# Altium PCB STM32.PcbDoc (part 2 of 2)
Units mil, origin at the board's own origin, x right, y up, seen from the top; angles counter-clockwise.
Board outline 5198.85 x 3910.46 mil, 2 copper layers (Top Layer, Bottom Layer); 118 components, 169 nets, 618 pads, 156 vias.
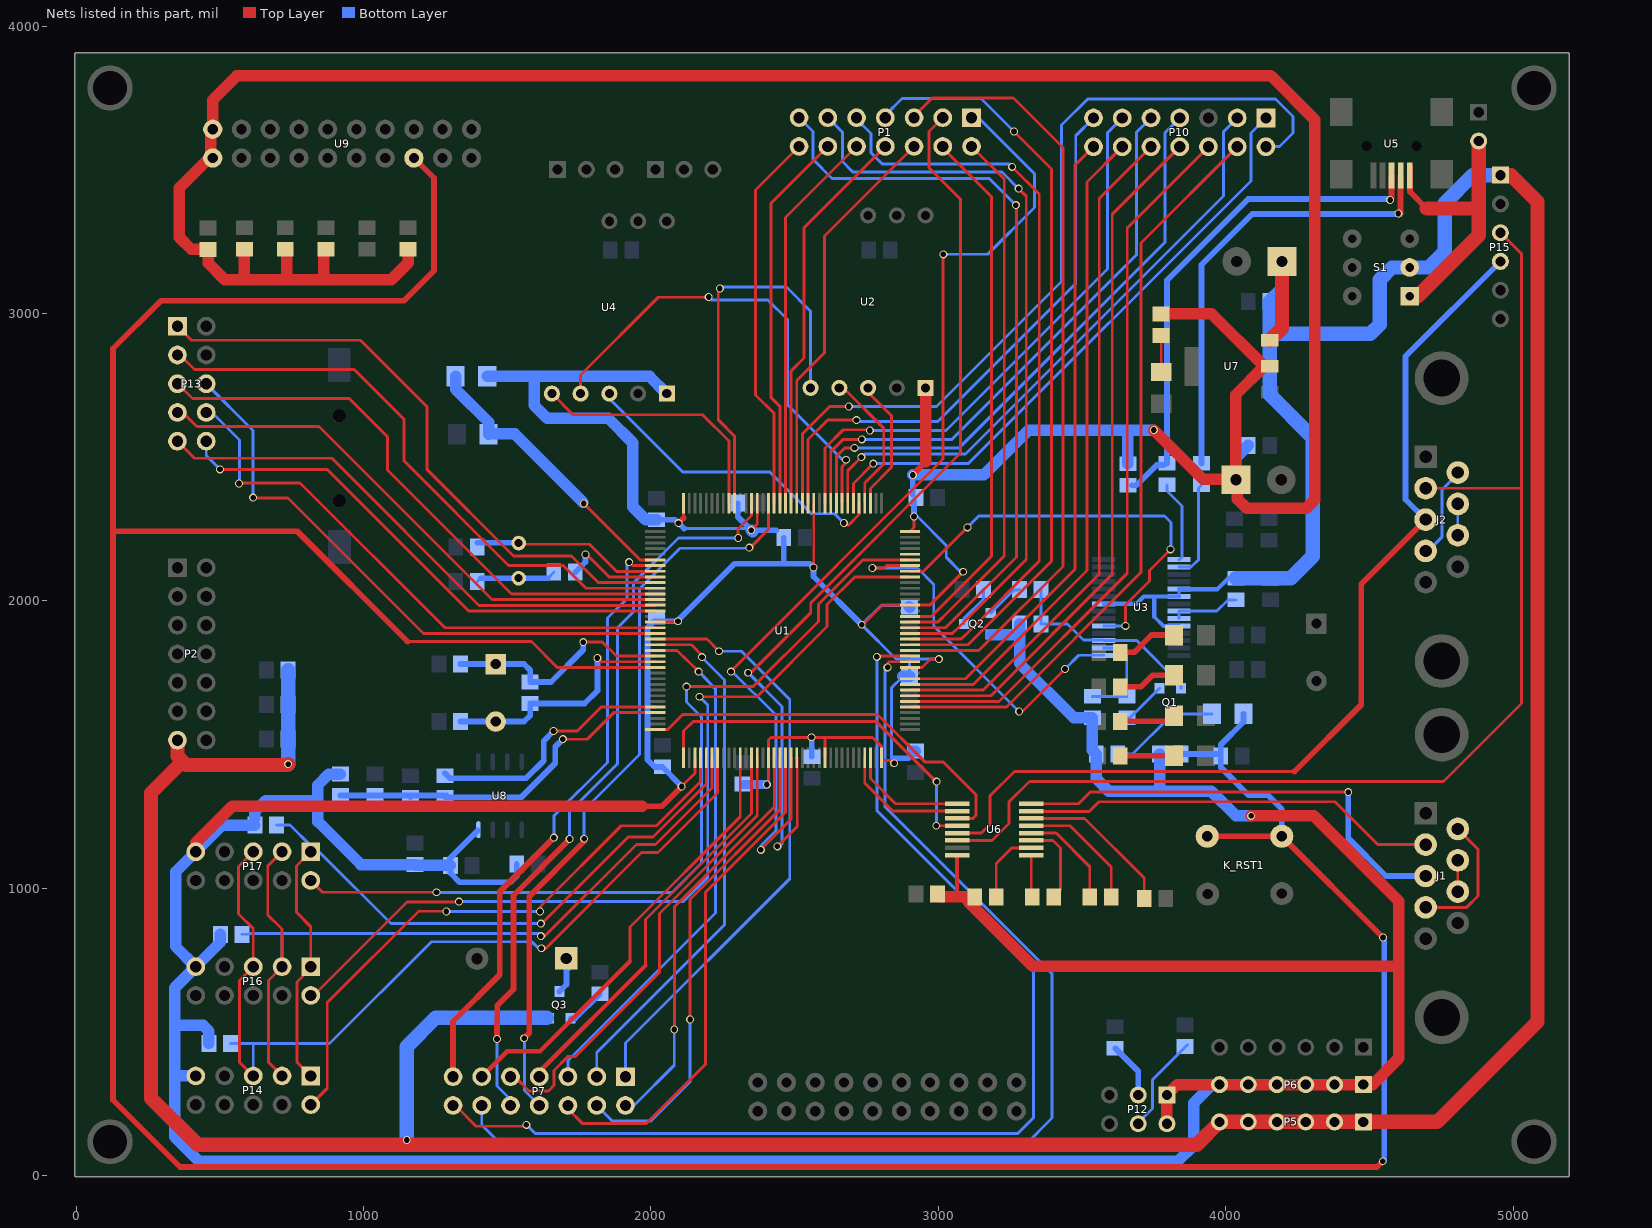
[diagram p2: the nets of this part, all layers, seen from the top]

## Via types
v1: diameter 27.56, hole 19.68, Top Layer to Bottom Layer, 156 vias

## Nets (pads, with @x,y where several pads share a name; then routed paths per layer and width w, separated by ;. In a path a pad name is that pad's centre, name@x,y a point inside that pad or via, vN(x,y) a via of type N, cw(c..) or ccw(c..) an arc to the next point about the centre after c; other vN are vias at no path point) (continued)
NetC7_1: C7.1 U6.2 | length 260.2
  Top Layer w10: C7.1@3201.8,970.3 3201.8,1086.64 3255.93,1140.78 U6.2@3323.26,1140.78
NetC8_1: C8.1 U6.3 | length 292.4
  Top Layer w10: U6.3@3323.26,1166.37 3399.32,1166.37 3425.07,1140.62 3425.07,993.57 C8.1@3401.8,970.3
NetC8_2: C8.2 U6.1 | length 146.4
  Top Layer w10: U6.1@3323.26,1115.19 3323.26,974.04 C8.2@3327,970.3
NetC10_1: C10.1 U1.8 Y2.2 | length 659.3
  Top Layer w10: Y2.2@1540,2196.85 1786.42,2196.85 1881.19,2102.08 2014.52,2102.08 U1.8@2015.58,2103.14
  Bottom Layer w20: C10.1@1396.02,2201.93 Y2.2@1540,2201.93
NetC11_1: C11.1 U6.5 | length 441.8
  Top Layer w10: U6.5@3323.26,1217.55 3458.38,1217.55 3601.8,1074.12 C11.1@3601.8,970.3
NetC11_2: C11.2 U6.4 | length 356.9
  Top Layer w10: U6.4@3323.26,1191.96 3410.15,1191.96 3527,1075.11 C11.2@3527,970.3
NetC12_2: C12.2 U6.6 | length 550.3
  Top Layer w10: U6.6@3323.26,1243.14 3508.57,1243.14 3716.41,1035.3 C12.2@3716.41,964.28
NetC13_1: C13.1 R24.1 Y2.1 | length 280.2
  Bottom Layer w10: C13.1@1396.02,2067.16 C13.1@1407.84,2078.98 ; R24.1@1641.58,2078.98 R24.1@1662.6,2100
  Bottom Layer w20: C13.1@1407.84,2078.98 Y2.1@1540,2078.98 R24.1@1641.58,2078.98
NetC14_2: C14.2 R28.1 U1.23 Y3.1 | length 821.4
  Top Layer w10: v1(1764.76,1856.3) 1831.69,1856.3 1880.13,1807.86 U1.23@2015.58,1807.86
  Bottom Layer w20: C14.2@1337.4,1780 Y3.1@1460,1780 1558.58,1780 1580,1758.58 R28.1@1580,1717.4 1652.44,1717.4 1764.76,1829.72 v1(1764.76,1856.3)
NetC19_2: C19.2 R28.2 U1.24 Y3.2 | length 866.2
  Top Layer w10: v1(1813.98,1801.18) 1827.12,1788.03 2015.44,1788.03 U1.24@2015.58,1788.18
  Bottom Layer w20: C19.2@1337.4,1580 Y3.2@1460,1580 1558.35,1580 1580,1601.65 R28.2@1580,1642.6 1769.57,1642.6 1813.98,1687.01 v1(1813.98,1801.18)
NetD1_2: D1.2 Q1.1 R1.1 | length 385.5
  Bottom Layer w10: R1.1@3624.16,1466.92 3675.97,1466.92 Q1.1@3806.76,1597.71 3815.97,1606.92 D1.2@3951.64,1606.92
NetD2_1: D2.1 R9.1 | length 187.5
  Top Layer w20: R9.1@3632.98,1460.93 D2.1@3820.46,1460.93
NetD3_1: D3.1 R10.1 | length 195.8
  Top Layer w10: D3.1@3800.46,1580.93 D3.1@3820.46,1600.93
  Top Layer w20: R10.1@3632.98,1580.93 D3.1@3800.46,1580.93
NetD4_1: D4.1 R11.1 | length 204
  Top Layer w20: R11.1@3632.98,1700.93 3704.87,1700.93 3744.87,1740.93 D4.1@3820.46,1740.93
NetD5_1: D5.1 R12.1 | length 212.3
  Top Layer w20: R12.1@3632.98,1820.93 3682.15,1820.93 3742.15,1880.93 D5.1@3820.46,1880.93
NetD8_1: D8.1 R27.2 | length 127.5
  Top Layer w10: D8.1@3775.58,2796.05 R27.2@3775.58,2923.53
NetJ1_4: J1.4 J1.6 | length 460.9
  Top Layer w10: J1.4@4695.58,933.77 4838.3,933.77 4877.82,973.3 4877.82,1135.97 J1.6@4807.39,1206.41
NetJ1_7: J1.7 J1.8 | length 109.1
  Top Layer w10: J1.8@4807.39,988.3 J1.7@4807.39,1097.35
NetJ2_4: J2.4 J2.6 | length 324
  Bottom Layer w10: J2.4@4695.58,2173.77 4704.28,2173.77 4751.84,2221.33 4751.84,2385.39 4807.39,2440.94 J2.6@4807.39,2446.41
NetJ2_7: J2.7 J2.8 | length 109.1
  Bottom Layer w10: J2.8@4807.39,2228.3 J2.7@4807.39,2337.35
NetLS1_1: LS1.1 Q3.1 | length 106.6
  Bottom Layer w20: Q3.1@1682.47,640.74 1706.87,665.13 1706.87,715.13 LS1.1@1722.47,730.74
NetP12_3: P12.3 R20.2 | length 195.7
  Bottom Layer w20: R20.2@3615.58,443.53 3695.58,363.53 P12.3@3695.58,280.93
NetP12_4: P12.4 R21.1 | length 342
  Bottom Layer w10: P12.4@3695.58,184.75 3745.08,234.25 3745.08,333.66 R21.1@3867.13,455.71
NetQ1_2: Q1.2 R3.2 | length 156.3
  Bottom Layer w10: R3.2@3655.82,1593.02 3666.25,1593.02 Q1.2@3769.36,1696.13
NetQ1_3: Q1.3 R5.2 R13.2 U3.3 | length 706.3
  Bottom Layer w10: R13.2@3357.4,2040 R5.2@3357.4,1920 3449.1,1920 3504.78,1864.32 3573.3,1864.32 U3.3@3575.86,1861.76 3690.15,1861.76 3844.16,1707.74 Q1.3@3844.16,1696.13
NetQ2_1: Q2.1 R15.2 | length 147.9
  Bottom Layer w10: Q2.1@3090,1920 3090,1939.41 3157.4,2006.81 R15.2@3157.4,2040
NetQ2_2: Q2.2 R13.1 | length 134.3
  Bottom Layer w10: Q2.2@3182.52,1957.4 3262.52,2037.4 3280,2037.4 R13.1@3282.6,2040
NetQ3_2: Q3.2 R33.2 | length 135.7
  Bottom Layer w20: Q3.2@1722.44,547.24 1736.38,547.24 R33.2@1822.47,633.34
NetR2_1: R2.1 R3.1 U3.2 | length 357.9
  Bottom Layer w10: R2.1@3535.82,1667.82 R3.1@3655.82,1667.82 3655.82,1818.34 3637.98,1836.17 U3.2@3575.86,1836.17
NetR14_1: R14.1 U3.22 U3.23 | length 239.8
  Bottom Layer w10: U3.23@3837.67,1938.53 U3.22@3837.67,1964.12 3968.06,1964.12 4007.47,2003.53 R14.1@4035.58,2003.53
NetR16_2: R16.2 U5.2 | length 1584.1
  Top Layer w20: v1@4607.28,3345.47 4608.51,3346.69 U5.2@4608.51,3480
  Bottom Layer w20: R16.2@3915.58,2478.34 3915.58,3169.48 4092.19,3346.09 v1@4600.39,3346.09
  other v1: 4600.39,3347.44
NetR18_2: R18.2 R19.2 U5.3 | length 1752.7
  Top Layer w20: v1(4571.85,3394.68) 4577.01,3399.84 U5.3@4577.01,3480
  Bottom Layer w20: R19.2@3674.13,2402.6 3690,2402.6 3759.84,2472.44 R18.2@3783.46,2472.44 ; R18.2@3795.58,2478.34 3795.58,3115.46 4078.39,3398.28 v1@4568.26,3398.28
NetR24_2: R24.2 U1.9 | length 351.2
  Top Layer w10: v1(1772.64,2161.42) 1776.95,2161.42 1854.91,2083.45 U1.9@2015.58,2083.45
  Bottom Layer w20: R24.2@1737.4,2100 1772.64,2135.24 v1(1772.64,2161.42)
NetR30_1: R30.1 U1.32 | length 881.9
  Top Layer w10: v1(1661.42,1547.24) 1744.09,1547.24 1827.55,1630.7 U1.32@2015.58,1630.7
  Bottom Layer w20: R30.1@1283.86,1400.08 1301.06,1382.87 1565.94,1382.87 1626.97,1443.9 1626.97,1512.8 v1(1661.42,1547.24)
OUTPUT1: P13.1 U1.10 | length 2160
  Top Layer w10: P13.1@352.94,2955.42 401.68,2906.68 989.97,2906.68 1220.47,2676.18 1220.47,2457.68 1521.65,2156.5 1724.41,2156.5 1817.14,2063.77 U1.10@2015.58,2063.77
OUTPUT2: P13.3 U1.11 | length 2083.5
  Top Layer w10: P13.3@352.94,2855.42 361.11,2855.42 411.67,2804.86 967.78,2804.86 1141.73,2630.91 1141.73,2486.22 1504.92,2123.03 1694.88,2123.03 1773.83,2044.08 U1.11@2015.58,2044.08
OUTPUT3: P13.5 U1.12 | length 2032.9
  Top Layer w10: P13.5@352.94,2755.42 404.75,2703.61 950.92,2703.61 1083.66,2570.87 1083.66,2455.71 1514.97,2024.4 U1.12@2015.58,2024.4
OUTPUT4: P13.7 U1.13 | length 1932.2
  Top Layer w10: P13.7@352.94,2655.42 371.15,2655.42 420.28,2606.3 845.47,2606.3 1447.06,2004.71 U1.13@2015.58,2004.71
OUTPUT5: P13.9 U1.14 | length 1899.4
  Top Layer w10: P13.9@352.94,2555.42 412.3,2496.06 890.75,2496.06 1402.43,1984.39 2014.94,1984.39 U1.14@2015.58,1985.03
OUTPUT6: P13.10 U1.15 | length 1836.2
  Top Layer w10: v1(500.98,2457.68) 873.03,2457.68 1365.36,1965.34 U1.15@2015.58,1965.34
  Bottom Layer w10: P13.10@452.94,2555.42 452.94,2505.72 v1(500.98,2457.68)
OUTPUT7: P13.8 U1.18 | length 1962.4
  Top Layer w10: v1@566.93,2410.43 779.53,2410.43 1283.67,1906.29 U1.18@2015.58,1906.29
  Bottom Layer w10: P13.8@452.94,2655.42 473.51,2655.42 569.1,2559.83 v1@569.1,2410.64
  other v1: 566.93,2408.46
OUTPUT8: P13.6 U1.19 | length 2059.5
  Top Layer w10: v1(616.14,2359.25) 616.14,2358.31 616.18,2358.27 737.2,2358.27 1208.87,1886.6 U1.19@2015.58,1886.6
  Bottom Layer w10: P13.6@452.94,2755.42 616.14,2592.22 v1(616.14,2359.25)
PA2: U1.36 U6.11 | length 1394.8
  Top Layer w10: U1.36@2015.58,1551.96 2058.85,1551.96 2111.22,1604.33 2788.39,1604.33 2952.76,1439.96 3016.47,1439.96 3131.76,1324.67 3131.76,1254.79 3120.11,1243.14 U6.11@3065.38,1243.14
PA3: U1.37 U6.12 | length 1297.5
  Top Layer w10: U1.37@2114.01,1456.37 2114.01,1547.08 2146.65,1579.72 2784.19,1579.72 2992.98,1370.93 2994,1370.93 v1(2994.09,1371.06) ; v1(2992.82,1217.55) U6.12@3065.38,1217.55
  Bottom Layer w10: v1(2992.82,1217.55) 2994.09,1218.82 v1(2994.09,1371.06)
PA4: P14.2 U1.40 | length 2093
  Top Layer w10: P14.2@816.68,247.15 873.89,304.36 873.89,602.23 1192.91,921.26 v1(1288.39,919.29) ; v1(1614.17,919.29) 1616.14,919.29 1616.14,937.01 1896.65,1217.52 2019.68,1217.52 2173.06,1370.89 U1.40@2173.06,1456.37
  Bottom Layer w10: v1(1288.39,919.29) v1(1614.17,919.29)
PA5: P14.1 P16.1 P17.1 R35.1 U1.41 | length 2799.1
  Top Layer w10: P14.1@816.68,347.15 769.2,394.64 769.2,673.73 816.68,721.21 816.68,866.39 766.73,916.34 766.73,1077.2 P17.1@816.68,1127.15 ; v1(1617.13,876.97) 1620.08,876.97 1921.26,1178.15 2007.87,1178.15 2192.75,1363.02 U1.41@2192.75,1456.37
  Bottom Layer w10: R35.1@697.4,1220 744.57,1220 816.68,1147.88 P17.1@816.68,1127.15 845.29,1127.15 1095.47,876.97 v1@1611.22,876.97
PA6: P14.3 P16.3 P17.3 R36.1 U1.42 | length 2932.5
  Top Layer w10: P14.3@716.68,347.15 669.2,394.64 669.2,679.67 P16.3@716.68,727.15 716.68,858.12 667.19,907.61 667.19,1077.67 P17.3@716.68,1127.15 ; v1(1617.13,833.66) 1630.91,833.66 1949.8,1152.56 2015.75,1152.56 2212.43,1349.24 U1.42@2212.43,1453.53
  Bottom Layer w10: R36.1@577.4,840 603.84,840 606.36,842.52 1608.27,842.52 v1(1617.13,833.66) ; P16.3@716.68,727.15 716.68,841.68
PA7: P14.5 P16.5 P17.5 R39.1 U1.43 | length 3175
  Top Layer w10: P14.5@616.68,347.15 568.9,394.94 568.9,679.37 P16.5@616.68,727.15 616.68,859.7 565.82,910.56 565.82,1076.29 P17.5@616.68,1127.15 ; v1(1619.09,791.34) 1634.84,791.34 1967.52,1124.02 2024.61,1124.02 2232.12,1331.52 U1.43@2232.12,1453.53
  Bottom Layer w10: R39.1@537.4,460 882.24,460 1236.22,813.98 1585.63,813.98 1610.24,789.37 v1@1621.06,789.37 ; 613.82,460 616.68,457.14 P14.5@616.68,347.15
PA8: P16.2 U1.100 | length 3141.1
  Top Layer w10: P16.2@816.68,627.15 825.97,627.15 1151.57,952.76 1331.69,952.76 v1(1332.68,953.74) ; v1(2169.29,1666.34) 2369.09,1666.34 2613.19,1910.43 2613.19,1987.2 2709.44,2083.45 U1.100@2901.41,2083.45
  Bottom Layer w10: v1(1332.68,953.74) 2113.19,953.74 2197.83,1038.39 2197.83,1637.8 v1(2169.29,1666.34)
PA9: U1.101 U3.5 | length 1498.2
  Top Layer w10: U1.101@2901.41,2103.14 2948.61,2103.14 v1(3101.38,2255.91) ; v1(3651.13,1912.94) 3651.13,1985.78 3734.25,2068.9 3734.25,2105.32 v1(3808.07,2179.13)
  Bottom Layer w10: v1(3101.38,2255.91) 3140.62,2295.15 3787.53,2295.15 3809.91,2272.77 3809.91,2180.97 v1(3808.07,2179.13) ; U3.5@3575.86,1912.94 v1(3651.13,1912.94)
PA10: U1.102 U3.1 | length 1312.1
  Top Layer w10: v1(2770.67,2114.17) 2812.01,2114.17 2820.66,2122.82 U1.102@2901.41,2122.82 ; 3296.99,1618.84 v1(3440.94,1762.8)
  Bottom Layer w10: v1(2770.67,2114.17) 2927.17,2114.17 2984.25,2057.09 2984.25,1912.4 3277.82,1618.84 3279.48,1618.84 3281.47,1616.85 v1(3281.47,1615.14) ; v1(3440.94,1762.8) 3488.73,1810.58 U3.1@3575.86,1810.58 U3.1@3559.6,1810.58
PA11: P17.2 U1.103 | length 3049.8
  Top Layer w10: P17.2@816.68,1027.15 857.62,986.22 v1(1253.94,986.22) ; v1(2124.02,1701.77) 2124.22,1701.57 2356.09,1701.57 2582.68,1928.15 2582.68,1988.19 2737,2142.51 U1.103@2901.41,2142.51
  Bottom Layer w10: v1(1253.94,986.22) 1254.3,985.86 2074.44,985.86 2176.18,1087.6 2176.18,1595.47 2124.02,1647.64 v1(2124.02,1701.77)
PA12: U1.104
PB1: P7.6 U1.47 | length 1551.1
  Top Layer w10: 1927.16,746.05 1927.16,865.15 2310.86,1248.85 U1.47@2310.86,1456.37
  Top Layer w15: P7.6@1411.64,344.52 1500.2,433.07 1614.17,433.07 1927.16,746.05
PB5: U1.135 U2.5 | length 1386.2
  Top Layer w10: v1(2240.16,3086.61) 2234.25,3080.71 2234.25,2629.92 2291.17,2573 U1.135@2291.17,2342.19
  Bottom Layer w10: v1@2241.14,3091.54 2471.46,3091.54 2555.58,3007.41 U2.5@2555.58,2740.93
PB6: U1.136 U4.5 | length 898.2
  Top Layer w10: U4.5@1655.58,2720.93 1728.88,2647.64 2180.11,2647.64 2271.49,2556.26 U1.136@2271.49,2342.19
PB10: U1.69 U6.10 | length 451.9
  Top Layer w10: U1.69@2743.93,1456.37 2743.93,1366.31 2841.51,1268.73 U6.10@3065.38,1268.73
PB11: U1.70 U6.9 | length 412.4
  Top Layer w10: U1.70@2763.61,1456.37 2763.61,1382.06 2851.35,1294.32 U6.9@3065.38,1294.32
PC10: U1.111 U2.3 | length 462.5
  Top Layer w10: U2.3@2755.58,2740.93 2755.58,2725.72 2836.61,2644.69 2836.61,2463.58 2763.61,2390.58 U1.111@2763.61,2342.19
PC11: U1.112 U2.4 | length 498.3
  Top Layer w10: U2.4@2655.58,2740.93 2661.33,2735.18 2675.25,2735.18 2810.04,2600.39 2810.04,2475.91 2743.93,2409.79 U1.112@2743.93,2342.19
PC12: U1.113 U4.3 | length 1126.2
  Top Layer w10: v1(2671.26,2270.67) 2671.26,2268.15 2674.95,2264.46 2688.47,2264.46 2724.24,2300.23 U1.113@2724.24,2342.19
  Bottom Layer w10: U4.3@1855.58,2720.93 1855.58,2703.48 2110.72,2448.34 2413.87,2448.34 2559.06,2303.15 2638.78,2303.15 v1(2671.26,2270.67)
PC13: P7.7 U1.7 | length 2140.4
  Top Layer w10: v1(1924.21,2134.84) 1936.23,2122.82 U1.7@2015.58,2122.82
  Top Layer w20: P7.7@1311.64,344.52 1311.64,536.05 1474.47,698.88 1474.47,988.25 v1(1662.4,1176.18)
  Bottom Layer w10: v1(1662.4,1176.18) 1662.4,1250.98 1849.41,1437.99 1849.41,1940.06 1916.34,2006.99 1916.34,2126.97 v1(1924.21,2134.84)
PD0: P10.1 U1.114 | length 2126.1
  Top Layer w10: U1.114@2704.56,2342.19 2704.56,2408.3 v1@2773.63,2477.37
  Bottom Layer w10: v1(2773.63,2477.44) 3104.41,2477.44 4087.6,3460.63 4087.6,3627.6 P10.1@4140,3680
PD1: P10.2 U1.115 | length 2089.6
  Top Layer w10: U1.115@2684.87,2342.19 2684.87,2452.59 v1(2732.28,2500)
  Bottom Layer w10: 2743.11,2510.83 3094.49,2510.83 3992.17,3408.51 3992.17,3632.17 P10.2@4040,3680
PD2: U1.116 U4.4 | length 1663.4
  Top Layer w10: U4.4@1755.58,2720.93 1755.58,2786.09 2025.59,3056.1 2200.14,3056.1 v1(2200.96,3056.92) ; U1.116@2665.19,2342.19 2665.19,2466.37 2679.13,2480.32 v1(2679.13,2490.97)
  Bottom Layer w10: v1(2200.96,3056.92) 2210.63,3047.24 2406.5,3047.24 2475.26,2978.48 2475.26,2682.22 2666.51,2490.97 v1(2679.13,2490.97)
PD3: P10.4 U1.117 | length 2065.6
  Top Layer w10: U1.117@2645.5,2342.19 2645.5,2502.95 2675.03,2532.48 v1(2708.66,2532.48)
  Bottom Layer w10: v1(2708.66,2532.48) 3072.83,2532.48 3789.37,3249.02 3789.37,3629.37 P10.4@3840,3680
PD4: P10.5 U1.118 | length 2031.8
  Top Layer w10: U1.118@2625.82,2339.36 2625.82,2518.53 2669.29,2562.01 v1(2734.25,2562.01)
  Bottom Layer w10: v1@2730.44,2561.99 v1(2734.25,2562.01) ; v1@2730.44,2562.01 3048.23,2562.01 3688.98,3202.76 3688.98,3628.98 P10.5@3740,3680
PD5: P10.6 U1.119 | length 1982.4
  Top Layer w10: U1.119@2606.13,2339.36 2606.13,2532.31 2669.29,2595.47 2758.86,2595.47 v1(2761.81,2592.52)
  Bottom Layer w10: v1(2761.81,2592.52) 3026.57,2592.52 3588.58,3154.53 3588.58,3628.58 P10.6@3640,3680
PD6: P10.7 U1.122 | length 1980.1
  Top Layer w10: U1.122@2547.08,2342.19 2547.08,2560.85 2615.16,2628.94 v1(2715.55,2628.94)
  Bottom Layer w10: v1(2715.55,2628.94) 2720.14,2624.35 2998.36,2624.35 3478.35,3104.33 3478.35,3618.35 P10.7@3540,3680
PD7: P10.8 U1.123 | length 2943.5
  Top Layer w10: U1.123@2527.39,2342.19 2527.39,2581.52 2622.05,2676.18 v1(2688.98,2676.18)
  Bottom Layer w10: v1(2688.98,2676.18) 2994.09,2676.18 3429.13,3111.22 3429.13,3655.51 3519.69,3746.06 4173.23,3746.06 4234.25,3685.04 4234.25,3627.95 4187.23,3580.93 P10.8@4140,3580.93
PD8: P10.9 U1.77 | length 2617.6
  Top Layer w10: U1.77@2901.41,1630.7 3237,1630.7 3705.58,2099.28 3705.58,2252.48 3705.5,2252.56 3705.5,3245.5 P10.9@4040,3580
PD9: P10.10 U1.78 | length 2541.4
  Top Layer w10: U1.78@2901.41,1650.38 3211.41,1650.38 3657.35,2096.33 3657.35,3222.71 3657.35,3297.35 P10.10@3940,3580
PD10: P10.11 U1.79 | length 2463.6
  Top Layer w10: U1.79@2901.41,1670.07 3182.86,1670.07 3605.19,2092.39 3605.19,3270.54 3605.19,3345.19 P10.11@3840,3580
PD11: P10.12 U1.80 | length 2386.9
  Top Layer w10: U1.80@2901.41,1689.75 3156.29,1689.75 3559.91,2093.38 3559.91,3399.91 P10.12@3740,3580
PD12: P10.13 U1.81 | length 2305.6
  Top Layer w10: U1.81@2901.41,1709.44 3121.84,1709.44 3517.72,2105.31 3517.72,3457.72 P10.13@3640,3580
PD13: P10.14 U1.82 | length 2228.4
  Top Layer w10: U1.82@2901.41,1729.12 3094.28,1729.12 3475.39,2110.24 3475.39,3515.39 P10.14@3540,3580
PD14: P7.13 U1.85 | length 4026.5
  Top Layer w10: v1@2814.96,1773.62 2816,1773.62 2825.01,1782.63 2825.01,1783.67 2829.52,1788.18 U1.85@2901.41,1788.18
  Bottom Layer w10: P7.13@1411.64,244.52 1411.64,176.94 1482.28,106.3 3301.18,106.3 3395.67,200.79 3395.67,702.76 2814.96,1283.46 v1@2814.96,1773.62
  other v1: 2823.82,1768.7
PD15: P7.14 U1.86 | length 4024
  Top Layer w10: P7.14@1311.64,244.52 1319.88,244.52 1392.15,172.24 1562.01,172.24 v1(1566.93,177.17) ; v1@2794.09,1807.86 U1.86@2901.41,1807.86
  Bottom Layer w10: v1(1566.93,177.17) 1597.44,146.65 3276.57,146.65 3331.69,201.77 3331.69,724.41 2786.42,1269.69 v1(2786.42,1805.12)
PF8: P7.1 U1.20 | length 2103.6
  Top Layer w10: U1.20@2015.58,1866.92 2195.09,1866.92 v1(2237.2,1824.8)
  Bottom Layer w10: P7.1@1911.64,344.52 1911.64,461.84 2483.27,1033.46 2483.27,1656.5 2314.96,1824.8 v1(2237.2,1824.8)
PF9: P7.2 U1.21 | length 1854.7
  Top Layer w10: U1.21@2028.54,1847.44 2141.73,1847.44 v1@2181.04,1806.94
  Bottom Layer w10: P7.2@1811.64,344.52 1811.64,428.77 2255.91,873.03 2255.91,1724.75 v1@2170.44,1810.21
  other v1: 2178.15,1804.13
PF10: P7.3 U1.22 | length 1826.7
  Top Layer w10: U1.22@2015.58,1827.55 2090.5,1827.55 v1(2166.34,1753.94)
  Bottom Layer w10: P7.3@1711.64,344.52 1711.64,400.62 2225.39,914.37 2225.39,1692.66 v1(2166.34,1753.94)
PF11: P7.4 U1.49 | length 1417.8
  Top Layer w10: 1981.29,731.29 1981.29,891.72 2350.23,1260.66 U1.49@2350.23,1456.37
  Top Layer w15: P7.4@1611.64,344.52 1611.64,361.64 1981.29,731.29
PF12: P7.5 U1.50 | length 1629.5
  Top Layer w10: P7.5@1511.64,344.52 1526.29,344.52 1575.66,295.15 1643.57,295.15 1663.39,314.96 1663.39,366.14 1712.6,415.35 1738.19,415.35 2029.52,706.69 2029.52,912.39 2369.91,1252.78 U1.50@2369.91,1456.37
PF13: P7.8 U1.53 | length 1444.6
  Top Layer w10: v1@2081.56,508.93 2081.56,934.91 2430.32,1283.67 2430.32,1452.18 U1.53@2428.97,1453.53 U1.53@2428.97,1456.37
  Bottom Layer w10: P7.8@1911.64,244.52 1941.37,244.52 2081.39,384.54 v1(2081.39,508.93)
PF14: P7.9 U1.54 | length 1659.6
  Top Layer w10: v1(2136.68,543.31) 2136.68,961.49 2448.65,1273.45 U1.54@2448.65,1453.53
  Bottom Layer w10: P7.9@1811.64,244.52 1865.22,190.94 2000.98,190.94 2136.68,326.64 v1(2136.68,543.31)
PF15: P7.10 U1.55 | length 1771.6
  Top Layer w10: P7.10@1711.64,244.52 1711.64,232.25 1762.8,181.1 1983.27,181.1 2189.83,387.67 2189.83,986.09 2468.34,1264.6 U1.55@2468.34,1446.72
PG0: P1.1 U1.56 | length 3632.6
  Top Layer w10: v1(2278.54,1753.94) 2278.54,1754.92 3016.73,2493.11 v1@3016.73,3204.72 ; v1(2382.87,1133.86) 2382.87,1134.84 2488.02,1239.99 U1.56@2488.02,1456.37
  Bottom Layer w10: v1@2281,1756.4 2435.04,1602.36 2435.04,1200.79 2382.87,1148.62 v1(2382.87,1133.86) ; v1(3017.72,3205.71) 3172.24,3205.71 3334.65,3368.11 3334.65,3486.22 3139.93,3680.93 P1.1@3115.58,3680.93
PG1: P1.2 U1.57 | length 3311.9
  Top Layer w10: v1(2338.58,1750) 2347.65,1750 2556.1,1958.46 2556.1,1993.11 3077.76,2514.76 3077.76,3397.38 2968.1,3507.04 2968.1,3633.45 P1.2@3015.58,3680.93 ; v1(2439.96,1145.67) 2509.06,1214.77 2509.06,1452.18 U1.57@2507.71,1453.53 U1.57@2507.71,1456.37
  Bottom Layer w10: v1(2338.58,1750) 2456.36,1632.23 2456.36,1154.19 2447.83,1145.67 v1(2439.96,1145.67)
PG2: P1.3 U1.87 | length 2762.6
  Top Layer w10: U1.87@2901.41,1827.55 3141.53,1827.55 3165.36,1851.38 ; P1.3@2915.58,3680.93 2915.58,3686.25 2979.2,3749.87 3261.94,3749.87 3434.06,3577.76 3434.06,2120.08 3165.36,1851.38 ; 3144.36,1830.38 3165.36,1851.38
PG3: P1.4 U1.88 | length 2690.3
  Top Layer w10: U1.88@2901.41,1847.23 3103.14,1847.23 3393.7,2137.8 3393.7,3502.95 v1(3263.65,3633)
  Bottom Layer w10: P1.4@2815.58,3680.93 2815.58,3689.6 2874.02,3748.03 3148.62,3748.03 v1(3263.65,3633)
PG4: P1.5 U1.89 | length 2666
  Top Layer w10: U1.89@2901.41,1866.92 3079.52,1866.92 3109.85,1897.25 ; 3082.35,1869.75 3109.85,1897.25 ; v1(3256.89,3509.84) 3351.38,3415.35 3351.38,2138.78 3109.85,1897.25
  Bottom Layer w10: P1.5@2715.58,3680.93 2715.58,3675.89 2765.62,3625.86 2765.62,3558.93 2804.86,3519.68 3247.05,3519.68 v1(3256.89,3509.84)
PG5: P1.6 U1.90 | length 2664.5
  Top Layer w10: U1.90@2901.41,1886.6 3049.01,1886.6 3070.29,1907.88 ; 3051.84,1889.44 3070.29,1907.88 ; v1(3279.53,3434.06) 3306.1,3407.48 3306.1,2143.7 3070.29,1907.88
  Bottom Layer w10: P1.6@2615.58,3680.93 2666.21,3630.3 2666.21,3528.41 2702.5,3492.13 3221.46,3492.13 v1(3279.53,3434.06)
PG6: P1.7 U1.91 | length 2676.4
  Top Layer w10: U1.91@2901.41,1906.29 3025.38,1906.29 3058.42,1939.33 ; 3028.41,1909.32 3058.42,1939.33 ; v1(3269.68,3376.97) 3271.65,3375 3271.65,2152.56 3058.42,1939.33
  Bottom Layer w10: P1.7@2515.58,3680.93 2563.85,3632.67 2563.85,3536.29 2630.65,3469.49 3177.17,3469.49 v1(3269.68,3376.97)
PG7: P1.8 U1.92 | length 1935.6
  Top Layer w10: U1.92@2901.41,1925.97 2998.81,1925.97 3030.38,1957.55 ; 3001.64,1928.81 3030.38,1957.55 ; P1.8@3115.58,3580.93 3229.33,3467.18 3229.33,2156.5 3030.38,1957.55
PG8: P1.9 U1.93 | length 1866.2
  Top Layer w10: U1.93@2901.41,1945.66 2975.19,1945.66 3185.04,2155.51 3185.04,3406.16 3015.58,3575.62 P1.9@3015.58,3580.93
PG9: P1.10 U1.124 | length 1407.7
  Top Layer w10: U1.124@2507.71,2342.19 2507.71,2766.56 2604.46,2863.32 2604.46,3269.82 P1.10@2915.58,3580.93
PG10: P1.11 U1.125 | length 1374.6
  Top Layer w10: U1.125@2488.02,2342.19 2488.02,2800.33 2488.33,2800.33 2532.48,2844.49 2532.48,3297.83 P1.11@2815.58,3580.93
PG11: P1.12 U1.126 | length 1341.2
  Top Layer w10: U1.126@2468.34,2342.19 2468.34,3333.69 P1.12@2715.58,3580.93
PG12: P1.13 U1.127 | length 1345.5
  Top Layer w10: U1.127@2448.65,2342.19 2448.65,2677.33 2417.32,2708.66 2417.32,3382.68 P1.13@2615.58,3580.93 P1.13@2615.58,3569.32
PG13: P1.14 U1.128 | length 1331.1
  Top Layer w10: U1.128@2428.97,2339.36 2428.97,2651.74 2364.17,2716.54 2364.17,3429.53 P1.14@2515.58,3580.93
PG14: P7.11 U1.129 | length 2611.2
  Top Layer w10: v1@2345.47,2185.04 2409.28,2248.85 U1.129@2409.28,2339.36
  Top Layer w20: v1(1559.06,478.35) 1576.77,496.06 1576.77,971.46 1767.72,1162.4 v1(1767.72,1172.24) ; v1(2342.52,2185.04) v1@2345.47,2185.04
  Bottom Layer w10: v1(1559.06,478.35) 1560.04,478.35 1560.04,296.12 P7.11@1611.64,244.52 ; v1(1767.72,1172.24) 1767.72,1272.64 1960.35,1465.27 1960.35,2042.04 2101.38,2183.07 2340.55,2183.07 v1(2342.52,2185.04)
PG15: P7.12 U1.132 | length 2603.5
  Top Layer w10: v1@2303.15,2219.49 2303.15,2250 2350.23,2297.08 U1.132@2350.23,2339.36
  Top Layer w20: v1(1464.57,475.39) 1465.42,592.39 1521.65,648.62 1521.65,975.39 v1(1717.52,1171.26) ; v1@2303.15,2219.49 v1(2304.13,2218.5)
  Bottom Layer w10: v1(1464.57,475.39) 1464.16,441.52 1464.16,312.41 1511.64,264.93 P7.12@1511.64,244.52 ; v1(1717.52,1171.26) 1717.52,1266.73 1883.86,1433.07 1883.86,1906.59 1938.98,1961.71 1938.98,2061.02 2096.46,2218.5 v1(2304.13,2218.5)
PL2303D+: R18.1 U3.15 | length 285.8
  Bottom Layer w10: R18.1@3795.58,2403.53 3795.58,2382.31 3847.44,2330.45 3847.44,2153.03 U3.15@3837.67,2143.26
PL2303D-: R16.1 U3.16 | length 342.7
  Bottom Layer w10: U3.16@3837.67,2117.67 3879.67,2117.67 3905.07,2143.06 3905.07,2393.02 R16.1@3915.58,2403.53
REST: C6.1 D1.1 K_RST1.1 R22.1 U1.25 U9.15 | length 13136.2
  Top Layer w10: 1153.67,1858.14 1584.77,1858.14 1674.42,1768.49 U1.25@2015.58,1768.49
  Top Layer w20: 128.94,2242.13 769.68,2242.13 1153.67,1858.14 ; U9.15@1175.58,3540.93 1245.08,3471.44 1245.08,3148.62 1140.75,3044.29 295.28,3044.29 128.94,2877.95 128.94,263.78 362.2,30.51 4526.57,30.51 v1(4546.26,50.2) ; K_RST1.1@3935.58,1180.93 K_RST1.1@4195.05,1180.93 v1(4547.28,828.7)
  Bottom Layer w20: R22.1@3844.16,1466.92 3975.68,1466.92 C6.1@3982.6,1460 ; D1.1@4061.88,1606.92 4061.88,1578.61 3982.6,1499.33 3982.6,1420.94 4079.72,1323.82 4146.65,1323.82 4195.05,1275.43 K_RST1.1@4195.05,1180.93 ; v1(4546.26,50.2) 4550.2,50.2 4551.18,51.18 v1@4551.18,828.7
RS232_2_RX: J2.3 P15.4 U6.13 | length 3449.8
  Top Layer w10: U6.13@3065.38,1191.96 3149.64,1191.96 3179.99,1222.31 3179.99,1321.72 3264.64,1406.37 4239.04,1406.37
  Top Layer w20: 4239.04,1406.37 4471.46,1638.78 4471.46,2058.7 J2.3@4695.58,2282.82
  Bottom Layer w20: J2.3@4695.58,2282.82 4625.86,2352.55 4625.86,2851.21 P15.4@4955.58,3180.93
RS232_2_TX: J2.2 P15.3 U6.14 | length 4221.3
  Top Layer w10: U6.14@3065.38,1166.37 3187.04,1166.37 3245.93,1225.27 3245.93,1301.05 3316.8,1371.92 4757.75,1371.92 5028.54,1642.72 5028.54,2387.8 ; J2.2@4695.58,2391.88 5024.46,2391.88 5028.54,2387.8 ; P15.3@4955.58,3280.93 5028.54,3207.97 5028.54,2387.8
  Bottom Layer w10: J2.2@4695.58,2391.88 J2.2@4695.58,2405.23
RS232_3_RX: J1.3 U6.8 | length 1603.7
  Top Layer w10: U6.8@3323.26,1294.32 3488.22,1294.32 3528.41,1334.52 v1(4426.18,1334.52)
  Bottom Layer w20: v1(4426.18,1334.52) 4426.18,1174.21 4557.57,1042.82 J1.3@4695.58,1042.82
RS232_3_TX: J1.2 U6.7 | length 1448.6
  Top Layer w10: U6.7@3323.26,1268.73 3324.4,1267.59 3525.46,1267.59 3559.06,1301.18 4379.92,1301.18 4529.22,1151.88 J1.2@4695.58,1151.88
VBAT: D6.2 D7.2 U1.6 | length 1009.7
  Top Layer w10: v1(1766.73,2338.58) 1962.81,2142.51 U1.6@2015.58,2142.51
  Bottom Layer w10: D7.2@1438.88,2583.76 D7.2@1441.93,2580.71 ; v1@1763.37,2343.92 1763.37,2340.91 1765.7,2338.58 v1(1766.73,2338.58)
  Bottom Layer w40: D6.2@1320.46,2780.93 1320.46,2736.62 1435.12,2621.97 D7.2@1435.12,2580 ; D7.2@1441.93,2580.71 1526.57,2580.71 v1@1763.37,2343.92
VCC: C4.2 C15.1 C16.2 P2.13 P5.1 P5.2 P5.3 P5.4 P5.5 P5.6 P15.1 Q3.3 R4.2 R6.2 R8.2 R14.2 S1.2 U3.8 U3.19 U3.20 U3.24 U7.3 | length 14499.6
  Top Layer w50: P2.13@352.94,1497.45 352.94,1460.05 383.86,1429.13 736.22,1429.13 738.19,1431.1 v1(738.19,1432.09) ; 358.27,1429.13 260.83,1331.69 260.83,269.69 423.23,107.28 3898.74,107.28 P5.6@3978.62,187.17 4736.38,187.17 5084.65,535.43 5084.65,3388.78 4992.49,3480.93 P15.1@4955.58,3480.93 ; U7.3@4153.45,2906.49 4195.58,2948.61 C15.1@4195.58,3180.93
  Bottom Layer w10: U3.20@3837.67,2015.3 U3.19@3837.67,2040.89 ; R14.2@4008.45,2078.34 R14.2@4035.58,2078.34
  Bottom Layer w13: 3750.98,1944.98 3783.02,1912.94 U3.24@3837.67,1912.94
  Bottom Layer w15: U3.8@3575.86,1989.71 3689.52,1989.71 3715.11,2015.3 U3.20@3837.67,2015.3 ; 3750.98,1944.98 3750.98,2015.3 ; U3.19@3837.67,2040.89 3971.01,2040.89 R14.2@4008.45,2078.34
  Bottom Layer w50: v1(738.19,1432.09) R4.2@738.19,1759.21 ; v1(1150.59,124.02) 1150.59,448.82 1251.97,550.2 Q3.3@1638.18,550.2 ; R14.2@4035.58,2078.34 C4.2@4155.58,2078.34 4225.97,2078.34 4303.15,2155.51 4303.15,2567.66 4152.98,2717.82 C16.2@4152.98,3040.93 4195.58,3083.53 C15.1@4195.58,3187.01 ; 4166.34,2929.13 4502.95,2929.13 4535.43,2961.61 4535.43,3117.13 4578.31,3160 4706.26,3160 4761.81,3215.55 4761.81,3383.86 4858.89,3480.93 P15.1@4955.58,3480.93
VCC3.3V: C7.2 C9.1 C17.1 C18.2 C20.2 C23.2 C24.2 C25.2 C26.2 C27.2 C28.2 C29.2 C30.2 C31.2 C32.2 C33.2 C34.2 D6.1 L1.2 P6.1 P6.2 P6.3 P6.4 P6.5 P6.6 P12.1 P12.2 P14.9 P16.9 P17.9 Q2.3 R1.2 R2.2 R5.1 R19.1 R22.2 R27.1 R34.2 R35.2 R36.2 R37.1 R38.1 R39.2 R40.1 R41.1 R42.1 U1.17 U1.39 U1.52 U1.62 U1.72 U1.84 U1.95 U1.108 U1.121 U1.131 U1.144 U2.1 U4.1 U6.16 U7.2 U8.8 U9.1 U9.2 | length 31523.5
  Top Layer w10: U1.17@2015.58,1925.97 v1@2091.33,1925.97 ; 2114.01,2288.22 U1.144@2114.01,2339.36 ; v1@2115.65,1362.7 2153.38,1400.42 U1.39@2153.38,1453.53 ; v1(2349.11,2246.1) 2369.91,2266.9 U1.131@2369.91,2339.36 ; v1@2409.28,1366.96 2409.28,1515.58 2418.18,1524.48 2605.11,1524.48 ; v1@2566.76,2116.96 U1.121@2566.76,2339.36 ; U1.62@2606.13,1453.53 2606.13,1523.45 ; 2607.15,1524.48 2771.17,1524.48 2802.98,1492.67 2802.98,1444.05 2837.45,1444.05 v1(2846.46,1435.04) ; v1@2736.02,1916.92 2804.13,1985.03 2970.27,1985.03 v1(3086.61,2101.38) ; U1.84@2873.59,1768.49 2943.69,1768.49 ; U1.108@2901.41,2240.93 2915.35,2254.88 v1(2915.35,2293.31) ; 2943.69,1769.69 2944.88,1769.69 2972.56,1797.36 v1(3002.08,1797.36)
  Top Layer w15: 3065.38,981.72 U6.16@3065.38,1115.19
  Top Layer w20: 1969.49,1285.43 2038.39,1285.43 v1(2107.28,1354.33) ; v1(2096.33,2270.54) 2114.01,2288.22 ; v1@2911.42,2438.98 2955.58,2483.14
  Top Layer w40: P17.9@416.68,1127.15 416.68,1158.81 543.31,1285.43 1969.49,1285.43 ; C23.2@460,3222.6 401.42,3222.6 359.25,3264.76 359.25,3436.79 469.49,3547.03 U9.2@469.49,3647.64 ; C23.2@460.63,3213.58 460.63,3174.21 517.72,3117.13 1096.46,3117.13 1155.58,3176.25 R42.1@1155.58,3223.53 ; U9.2@475.58,3640.93 475.58,3742.31 560.04,3826.77 4157.48,3826.77 4310.04,3674.21 4310.04,2351.38 4280.51,2321.85 4072.83,2321.85 4040.35,2354.33 C17.1@4040.35,2406.5 ; 585.38,3134.6 R38.1@585.38,3223.53 ; 733.27,3125 R40.1@733.27,3213.58 ; 862.2,3128.94 R41.1@862.2,3225.39 ; 2955.58,2483.14 U2.1@2955.58,2740.93 ; C9.1@3007.1,970.3 C7.2@3127,970.3 ; C7.2@3104.33,970.3 3104.33,952.76 3328.74,728.35 4589.57,728.35 ; v1(3749.87,2594.36) 3921.15,2423.08 4035.58,2423.08 4035.58,2717.67 4133.85,2815.93 3951.45,2998.34 R27.1@3775.58,2998.34 ; P12.2@3795.58,180.93 P12.1@3795.58,280.93 3831.81,317.17 4511.06,317.17 4602.36,408.46 4602.36,955.71 4306.1,1251.97 v1(4088.58,1251.97)
  Bottom Layer w10: 2114.9,2251.97 2343.25,2251.97 v1(2349.11,2246.1) ; 2836.61,1457.68 2836.61,1696.85 C20.2@2877.17,1737.4 ; C20.2@2900,1737.4 2900,1796.77 ; C27.2@2900,1977.4 2893.15,1984.25 2801.01,1984.25 v1(2733.68,1916.92) 2853.23,1797.36 v1(3002.08,1797.36) ; v1(2915.35,2293.31) 2927.17,2293.31 3027.47,2193 3027.47,2151.66 3077.76,2101.38 v1(3086.61,2101.38)
  Bottom Layer w20: R37.1@1300.63,1103.43 U8.8@1398.03,1200.83 ; R37.1@1302.6,1080 1302.6,1052.72 1334.65,1020.67 1511.81,1020.67 1533.42,1042.28 R34.2@1533.42,1084.6 ; C32.2@2020,2282.6 2084.27,2282.6 2114.9,2251.97 ; v1(2094.49,1929.13) 2010.83,1929.13 1988.19,1906.5 1988.19,1446.85 2013.43,1421.61 2040,1421.61 v1(2107.28,1354.33) ; v1@2096.43,1934.03 2291.34,2128.94 2553.15,2128.94 v1(2565.94,2116.14) 2565.94,2084.65 v1(2733.68,1916.92) ; C31.2@2302.6,2340 2302.6,2292.62 v1(2349.11,2246.1) 2436.49,2246.1 ; 2462.6,2133.86 C30.2@2462.6,2220 ; C29.2@2560,1457.4 v1@2560,1524.59 ; 2842.52,1452.76 2895.35,1452.76 C26.2@2920,1477.4 ; C28.2@2911.42,2368.82 v1(2911.42,2437.99) ; v1(2915.35,2293.31) C28.2@2915.35,2347.24
  Bottom Layer w30: C25.2@2321.38,1361.22 v1(2403.54,1361.22)
  Bottom Layer w40: 343.38,522.64 442.91,522.64 462.6,502.95 R39.2@462.6,460 ; 346.04,347.15 P14.9@416.68,347.15 ; P16.9@416.68,727.15 346.33,797.51 346.33,1056.8 509.53,1220 R35.2@622.6,1220 ; R36.2@502.6,840 502.6,813.07 343.38,653.85 343.38,134.97 427.17,51.18 3833.66,51.18 3888.78,106.3 3888.78,252.95 3952.99,317.17 P6.6@3978.62,317.17 ; R35.2@622.6,1243.66 622.6,1268.27 659.45,1305.12 838.58,1305.12 841.54,1308.07 ; L1.2@920,1397.4 879.68,1397.4 841.54,1359.25 841.54,1232.28 991.22,1082.6 C34.2@1180,1082.6 1182.6,1080 R37.1@1302.6,1080 ; D6.1@1430.7,2780.93 1995.58,2780.93 U4.1@2055.58,2720.93 ; 1594.36,2780.93 1594.36,2679.99 1639.64,2634.71 1852.49,2634.71 1937.01,2550.2 1937.01,2327.76 1982.17,2282.6 C32.2@2020,2282.6 ; v1(2349.11,2246.1) v1@2355.22,2240 ; C20.2@2877.17,1737.4 C20.2@2900,1737.4 ; C27.2@2898.07,1979.33 C27.2@2900,1977.4 ; C26.2@2911.42,1477.4 C26.2@2920,1477.4 ; v1(2911.42,2437.99) 3158.46,2437.99 3314.83,2594.36 v1(3749.87,2594.36) ; Q2.3@3182.52,1882.6 3263.78,1882.6 ; R5.1@3282.6,1920 3282.6,1782.36 3471.94,1593.02 R2.2@3535.82,1593.02 3535.82,1480.46 R1.2@3549.36,1466.92 3549.36,1381.74 3593.5,1337.6 3949.8,1337.6 4035.43,1251.97 v1(4088.58,1251.97) ; R19.1@3660,2477.4 3660,2589.99 ; R22.2@3769.36,1466.92 3770.67,1465.61 3770.67,1337.6 ; C17.1@4035.58,2420.93 4035.58,2498.34 C18.2@4078.18,2540.93
  other v1: 2559,1525.59
VCCIN: P9.2 S1.1 U5.1 | length 1007.9
  Top Layer w20: U5.1@4640.75,3511.81 4640.75,3423.23 4698.82,3365.16
  Top Layer w50: S1.1@4640,3060 4668.27,3060 4880,3271.73 P9.2@4880,3600 ; 4698.82,3365.16 4880,3365.16
VDDA: C21.2 C22.1 L1.1 R30.2 U1.33 | length 1253.6
  Top Layer w10: v1(1693.9,1518.7) 1778.54,1518.7 1870.86,1611.01 U1.33@2015.58,1611.01
  Bottom Layer w20: L1.1@920,1322.6 R30.2@1278.19,1322.6 ; R30.2@1289.85,1322.93 R30.2@1283.86,1316.93 1549.21,1316.93 1667.32,1435.04 1667.32,1492.13 v1(1693.9,1518.7)
pads on no net: BAT1.0 J1.1 J1.9 J1.10 J1.11 J2.1 J2.9 J2.10 J2.11 P2.11 P10.3 P11.2 P11.4 P11.6 P11.8 P13.2 P13.4 P14.4 P14.6 P14.8 P14.10 P16.4 P16.6 P16.8 P16.10 P17.4 P17.6 P17.8 P17.10 S1.3 S1.4 U1.106 U3.6 U3.9 U3.10 U3.11 U3.12 U3.13 U3.14 U5.4 U5.6 U5.7 U5.8 U5.9 U5.MH1 U5.MH2 U7.4 U9.11 U9.17 U9.19

## Polygon pours and split planes (outlines as drawn)
GND on Top Layer "Top Layer-No Net" (solid, remove dead copper): -233.27,-269.68 5439.96,-269.68 5520.67,-350.39 5568.9,-302.17 5568.9,4136.81 -241.14,4136.81 -306.1,4201.77 -208.66,4104.33 -208.66,-252.95
GND on Bottom Layer "Top Layer-No Net" (solid, remove dead copper): -541.34,-350.39 5358.27,-350.39 5488.19,-220.47 5316.93,-49.21 5316.93,4185.04 -143.7,4185.04 -249.02,4079.72 -355.31,3973.43 -355.31,-358.27

## Keep-outs
Keep-Out Layer:
  lines w7.87: 0,0 5189.96,0 5190.94,0.98 5190.94,3902.56 0,3902.56 0,0

## Silkscreen, mask and mechanical layers (free items; w line width, h text height)
Top Overlay:
  text "主板V1.0 11-12-2" at 969.49,1717.52 h200 r90
  text "GND" at 4548.23,434.06 h30
  text "VCC3.3V" at 4546.26,307.09 h30
  text "VCC5V" at 4552.17,174.21 h30

## Text inside footprints (layer, text, board x,y; h text height)
J1: Top Overlay "1" at 4559.56,1270.78 h30 r270; Top Overlay "5" at 4559.56,844.4 h30 r270; Top Overlay "9" at 4929.64,898.93 h30 r270; Top Overlay "6" at 4929.64,1226.09 h30 r270
J2: Top Overlay "1" at 4559.56,2510.78 h30 r270; Top Overlay "5" at 4559.56,2084.4 h30 r270; Top Overlay "9" at 4929.64,2138.93 h30 r270; Top Overlay "6" at 4929.64,2466.09 h30 r270
P1: Top Overlay "7" at 2468.34,3710.46 h30 r180; Top Overlay "14" at 2468.34,3610.46 h30 r180; Top Overlay "1" at 3182.5,3710.46 h30 r180; Top Overlay "8" at 3202.18,3610.46 h30 r180
P2: Top Overlay "13" at 323.41,1468.18 h30 r270; Top Overlay "14" at 423.41,1468.18 h30 r270; Top Overlay "1" at 323.41,2182.34 h30 r270; Top Overlay "2" at 423.41,2202.02 h30 r270
P7: Top Overlay "7" at 1264.4,374.04 h30 r180; Top Overlay "14" at 1264.4,274.04 h30 r180; Top Overlay "1" at 1978.56,374.04 h30 r180; Top Overlay "8" at 1998.25,274.04 h30 r180
P10: Top Overlay "7" at 3492.76,3709.53 h30 r180; Top Overlay "14" at 3492.76,3609.53 h30 r180; Top Overlay "1" at 4206.92,3709.53 h30 r180; Top Overlay "8" at 4226.6,3609.53 h30 r180
P12: Top Overlay "6" at 3535.58,200.93 h30 r180; Top Overlay "5" at 3535.58,300.93 h30 r180; Top Overlay "2" at 3895.58,200.93 h30 r180; Top Overlay "1" at 3875.58,300.93 h30 r180
P13: Top Overlay "2" at 423.41,3042.02 h30 r270; Top Overlay "1" at 337.94,3020.42 h30 r270; Top Overlay "10" at 423.41,2508.18 h30 r270; Top Overlay "9" at 323.41,2508.18 h30 r270
P14: Top Overlay "2" at 903.28,276.68 h30 r180; Top Overlay "1" at 883.6,376.68 h30 r180; Top Overlay "10" at 369.44,276.68 h30 r180; Top Overlay "9" at 369.44,376.68 h30 r180
P16: Top Overlay "2" at 903.28,656.68 h30 r180; Top Overlay "1" at 883.6,756.68 h30 r180; Top Overlay "10" at 369.44,656.68 h30 r180; Top Overlay "9" at 369.44,756.68 h30 r180
P17: Top Overlay "2" at 903.28,1056.68 h30 r180; Top Overlay "1" at 883.6,1156.68 h30 r180; Top Overlay "10" at 369.44,1056.68 h30 r180; Top Overlay "9" at 369.44,1156.68 h30 r180
U5: Mechanical 1 "PCB Edge" at 4735.92,3806.07 h30 r180